# EAGLE board omcPendelautomatik_tapein (EAGLE 7.7.0)
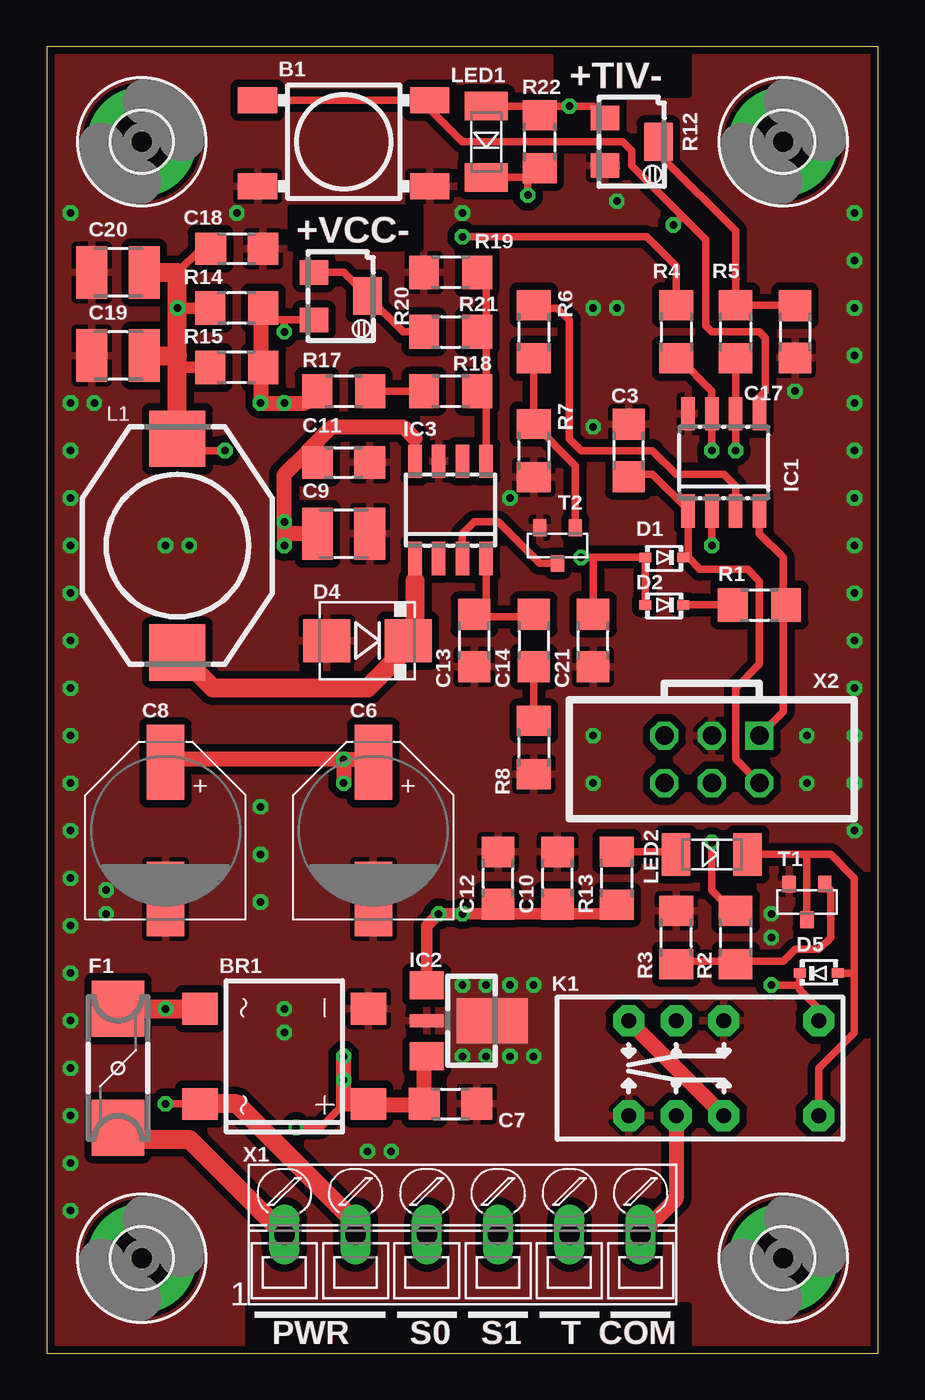
[diagram p0: board, top side]
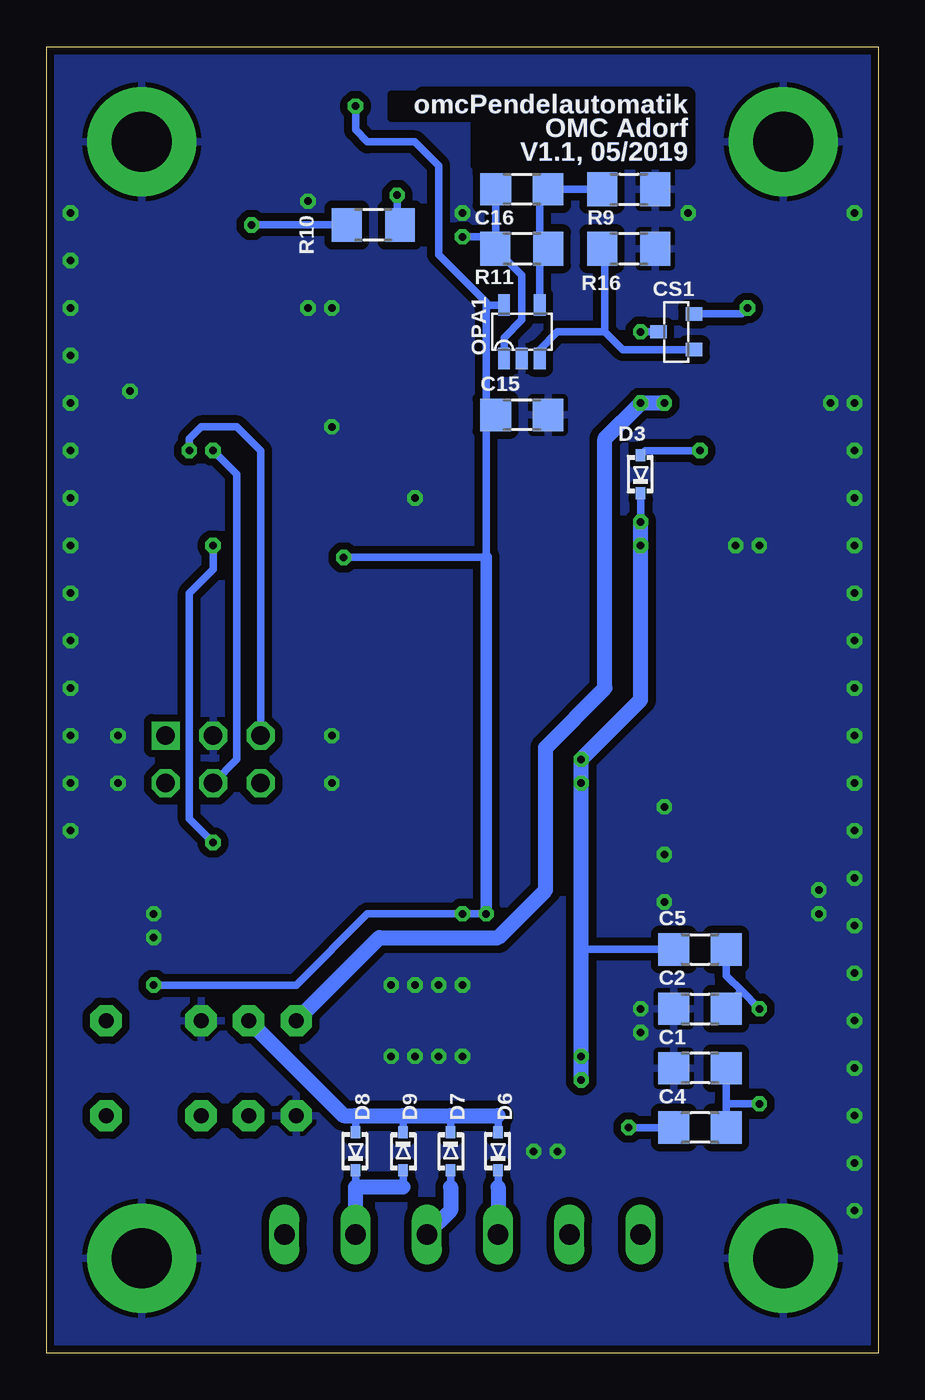
[diagram p1: board, bottom side, seen from below]

Size 44.45 x 69.85 mm. Coordinates in mm from the lower left corner, seen from the top.
Outline: 0,69.84 0,0 44.45,0 44.45,69.85 0,69.85
Copper layers (1*16): Top 0.035mm / dielectric 1.5mm / Bottom 0.035mm
Design rules "aisler_go": minimum track width 0.07mm, minimum drill 0.2mm, track to track 0.07mm, track to pad 0.07mm, pad to pad 0.07mm, via to via 0.07mm, smd to smd 0.07mm, copper to edge 0.2mm, drill to drill 0.21mm, minimum pad ring 0.25mm, minimum via ring 0.05mm, stop-mask expansion 0.05mm, vias tented up to drill 0mil, thermal gap 10mil

## Footprints (pad centres in the part's own frame; a part is rotated, then mirrored left to right if it is on the bottom)
SMD_X4_11X6 = smd 2.1 x 1.4: 1 4.604,-2.381; 2 -4.604,-2.381; 3 4.604,2.223; 4 -4.604,2.223
DBS = smd 1.7 x 1.9: + -2.55,-4.5; - 2.55,-4.5; AC1 -2.55,4.5; AC2 2.55,4.5
1206 = smd 1.651 x 1.727: 1 -1.4,0; 2 1.4,0
PANF = smd 2 x 4: CN 0,-3.651; CP 0,3.651
1210 = smd 1.651 x 2.794: 1 -1.4,0; 2 1.4,0
SOT23 = smd 0.711 x 0.889: 1 -0.953,-0.953; 2 0.953,-0.953; 3 0,0.953
SOD323 = smd 0.635 x 0.508: A 1.016,0; C -1.016,0
DO214AA = smd 2.5 x 2.3: A 2.175,0; C -2.175,0
OMT125 = smd 3 x 2.8: 1 -3.175,0; 2 3.175,0
3,2-PAD = drill 3.2 pad 5.842: B3,2 0,0
SOIC08 = smd 0.72 x 1.78: 1 -1.905,-2.6; 2 -0.635,-2.6; 3 0.635,-2.6; 4 1.905,-2.6; 5 1.905,2.6; 6 0.635,2.6; 7 -0.635,2.6; 8 -1.905,2.6
SOT89W = smd 1.5 x 1.8: 1 -1.905,-1.905; 3 1.905,-1.905 | smd 0.7 x 1.8: 2 0,-1.905 | smd 2.4 x 3.8: 4 0,1.587
SOIC08' = smd 1.78 x 0.72: 1 -2.6,1.905; 2 -2.6,0.635; 3 -2.6,-0.635; 4 -2.6,-1.905; 5 2.6,-1.905; 6 2.6,-0.635; 7 2.6,0.635; 8 2.6,1.905
THT_5M08M_5M08M_2M54M = drill 0.8 pad 1.676 octagon: 1 0,0; 3 5.08,0; 4 7.62,0; 5 10.16,0; 8 10.16,5.08; 9 7.62,5.08; 10 5.08,5.08; 12 0,5.08
PISM = smd 3 x 3: 1 -5.715,0; 2 5.715,0
LED3216 = smd 1.524 x 2.286: 1 -1.905,0; 2 1.905,0
SOT23-5 = smd 0.635 x 1.143: 1 0.953,1.111; 2 1.905,1.111; 3 2.857,1.111; 4 2.857,3.969; 5 0.953,3.969
1206' = smd 1.6 x 1.803: 1 -1.422,0; 2 1.422,0
TTM44W = smd 1.52 x 1.3: 1 4.445,1.905; 3 4.445,4.445 | smd 1.52 x 2.01: 2 1.587,3.175
RT03406T086 = drill 1.1 long: 1 0,0; 2 3.81,0; 3 7.62,0; 4 11.43,0; 5 15.24,0; 6 19.05,0
BOXHD-06-2.54-S = drill 1 square: 1 -1.27,2.54 | drill 1 octagon: 2 1.27,2.54; 3 -1.27,0; 4 1.27,0; 5 -1.27,-2.54; 6 1.27,-2.54

## Placement (x,y rotation side)
B1  JTP1138/4.3  [SMD_X4_11X6]  15.88,64.77 0 top
BR1  DB102S  [DBS]  12.7,15.88 90 top
C1  10n/50V  [1206]  9.53,15.24 180 bottom
C2  10n/50V  [1206]  9.53,18.41 0 bottom
C3  100n/50V  [1206]  31.11,48.26 90 top
C4  10n/50V  [1206]  9.53,12.06 180 bottom
C5  10n/50V  [1206]  9.53,21.59 0 bottom
C6  150µ/35V  [PANF]  17.46,27.94 0 top
C7  2µ2/50V  [1206]  21.59,13.34 0 top
C8  150µ/35V  [PANF]  6.35,27.94 0 top
C9  10µ/35V  [1210]  15.88,43.81 0 top
C10  100n/50V  [1206]  27.3,25.4 90 top
C11  100n/50V  [1206]  15.88,47.62 0 top
C12  2µ2/50V  [1206]  24.13,25.4 90 top
C13  220p/50V  [1206]  22.86,38.1 90 top
C14  22n/50V  [1206]  26.04,38.1 270 top
C15  100n  [1206]  19.05,50.16 180 bottom
C16  2n2  [1206]  19.05,62.23 180 bottom
C17  100n/50V  [1206]  40.01,54.61 270 top
C18  100n/50V  [1206]  10.16,59.05 0 top
C19  47µ/16V  [1210]  3.81,53.34 180 top
C20  47µ/16V  [1210]  3.81,57.78 180 top
C21  100n  [1206]  29.21,38.1 90 top
CS1  ZXCT1009  [SOT23]  10.79,54.61 90 bottom
D1  PMEG4010  [SOD323]  33.02,42.55 180 top
D2  PMEG4010  [SOD323]  33.02,40.01 180 top
D3  PMEG4010  [SOD323]  12.7,46.99 90 bottom
D4  MBRS240  [DO214AA]  17.14,38.1 180 top
D5  PMEG4010  [SOD323]  41.27,20.32 0 top
D6  PMEG4010  [SOD323]  20.32,10.79 90 bottom
D7  PMEG4010  [SOD323]  22.86,10.79 270 bottom
D8  PMEG4010  [SOD323]  27.94,10.79 90 bottom
D9  PMEG4010  [SOD323]  25.4,10.79 270 bottom
F1  T 0A5  [OMT125]  3.81,15.24 90 top
H1  MOUNT-PAD-ROUND3.2  [3,2-PAD]  39.37,5.08 0 top
H2  MOUNT-PAD-ROUND3.2  [3,2-PAD]  39.37,64.77 0 top
H3  MOUNT-PAD-ROUND3.2  [3,2-PAD]  5.08,64.77 0 top
H4  MOUNT-PAD-ROUND3.2  [3,2-PAD]  5.08,5.08 0 top
IC1  PIC12F675  [SOIC08]  36.2,47.62 0 top
IC2  7805  [SOT89W]  22.23,17.78 270 top
IC3  L5970D  [SOIC08']  21.59,45.09 90 top
K1  NA-5V  [THT_5M08M_5M08M_2M54M]  41.27,17.78 180 top
L1  33µ  [PISM]  6.99,43.18 90 top
LED1  Red  [LED3216]  23.5,64.77 270 top
LED2  Yellow  [LED3216]  35.56,26.67 0 top
OPA1  MCP6401  [SOT23-5]  20.95,52.07 0 bottom
R1  22K  [1206']  38.1,40.01 180 top
R2  10K  [1206']  36.83,22.23 90 top
R3  56K  [1206']  33.66,22.23 270 top
R4  1K  [1206']  33.66,54.61 90 top
R5  1K  [1206']  36.83,54.61 90 top
R6  10K  [1206']  26.04,54.61 90 top
R7  56K  [1206']  26.04,48.26 90 top
R8  4K7  [1206']  26.04,32.38 90 top
R9  10K  [1206']  13.34,62.23 180 bottom
R10  1K  [1206']  26.99,60.33 0 bottom
R11  39K  [1206']  19.05,59.05 180 bottom
R12  10K  [TTM44W]  34.29,67.94 180 top
R13  1K  [1206']  30.48,25.4 270 top
R14  1R  [1206']  10.16,55.88 0 top
R15  1R  [1206']  10.16,52.7 0 top
R16  200R  [1206']  13.34,59.05 180 bottom
R17  0R  [1206']  15.88,51.44 180 top
R18  47K  [1206']  21.59,51.44 180 top
R19  3K3  [1206']  21.59,57.78 0 top
R20  50K  [TTM44W]  18.73,59.69 180 top
R21  4K7  [1206']  21.59,54.61 180 top
R22  56K  [1206']  26.35,64.77 90 top
T1  BSS138  [SOT23]  40.64,24.13 180 top
T2  BSS138  [SOT23]  27.3,43.18 180 top
X1  RT034 Typ 086  [RT03406T086]  12.7,6.35 0 top
X2  2X3  [BOXHD-06-2.54-S]  35.56,31.75 270 top

## Library data of the parts
B1 = omcSwitch; DIST#REICHELT#: TASTER 9314
BR1 = omcDiode; DIST#REICHELT#: SMD DB1A70; VENDOR#: SEP ELECTRONIC CORP.,DB102S
C1 C2 C4 C5 = omcCapacitor; DIST#REICHELT#: X7R-G1206 10N; VENDOR#: YAGEO,12062R103K9BP0D
C3 C10 C11 C15 C17 C18 C21 = omcCapacitor; DIST#REICHELT#: X7R-G1206 100N; VENDOR#: YAGEO,12062R104K9BP0D
C6 C8 = omcCapacitor; DIST#REICHELT#: VF 150/35 P-F; ESR: 0R08; I_RIPPLE: 850m; VENDOR#: PANASONIC#EEEFP1V151AP
C7 C12 = omcCapacitor; DIST#REICHELT#: X7R-G1206 2,2/50; VENDOR#: MURATA,GCM31CR71H225KA55
C9 = omcCapacitor; DIST#REICHELT#: X7R-G1210 10; VENDOR#: MURATA,GCM32EC7YA106KA03
C13 = omcCapacitor; DIST#REICHELT#: NPO-G1206 220P; VENDOR#: YAGEO#1206CG221J9BP
C14 = omcCapacitor; DIST#REICHELT#: X7R-G1206 22N; VENDOR#: YAGEO,12062R223K9BP0D
C16 = omcCapacitor; DIST#REICHELT#: NPO-G1206 2,2N; VENDOR#: YAGEO#1206CG222J9BP
C19 C20 = omcCapacitor; DIST#REICHELT#: X5R-G1210 47; VENDOR#: MURATA,GRM32ER61C476ME15#
CS1 = omcPwrSupply; DIST#REICHELT#: ZXCT 1009FTA; VENDOR#: Diodes Incorporated, ZXCT1009
D1-D3 D5-D9 = omcDiode; DIST#REICHELT#: PMEG 4010BEA NXP; VENDOR#: NXP,PMEG3010BEA
D4 = omcDiode; DIST#REICHELT#: MBRS 240 SMD; VENDOR#: On Semiconductor,MBRS240LT3G
F1 = omcFuse; DIST#REICHELT#: OMT 125 0,5A; VENDOR#: Schurter,3404.0112.11
H1-H4 = holes
IC1 = omcPIC; DIST#REICHELT#: PIC 12F675-I/SN; VENDOR#: Microchip#PIC12F675-I/SN
IC2 = omcPwrSupply; DIST#REICHELT#: TS 78L05 ACY; VENDOR#: STM,L78L05ABUTR
IC3 = omcPwrSupply; DIST#CONRAD#: 1185187 - 62; DIST#REICHELT#: L 5970 D; VENDOR#: STM,L5970D013TR
K1 = omcRelay; DIST#REICHELT#: NA 05W K; VENDOR#: Fujitsu,NAA-05W-K
L1 = omcInductor; DIST#REICHELT#: L-PISM 33µ; VENDOR#: Fastron,PISM-330X-04
LED1 = omcOpto; DIST#REICHELT#: SMD-LED 1206 RT; VENDOR#: Kingbright,KP-3216HD
LED2 = omcOpto; DIST#REICHELT#: SMD-LED 1206 GE; VENDOR#: Kingbright,KP-3216SYD
OPA1 = omcOpAmp; DIST#REICHELT#: MCP 6401T-E/OT; VENDOR#: Microchip, MCP6401T-E/OT
R1 = omcResistor; DIST#REICHELT#: SMD 1/4W 22K; VENDOR#: YAGEO#RC1206FR-0722KL
R2 R6 R9 = omcResistor; DIST#REICHELT#: SMD 1/4W 10K; VENDOR#: YAGEO#RC1206FR-0710KL
R3 R7 R22 = omcResistor; DIST#REICHELT#: SMD 1/4W 56K; VENDOR#: YAGEO#RC1206FR-0756KL
R4 R5 R10 R13 = omcResistor; DIST#REICHELT#: SMD 1/4W 1,0K; VENDOR#: YAGEO#RC1206FR-071K0L
R8 R21 = omcResistor; DIST#REICHELT#: SMD 1/4W 4,7K; VENDOR#: YAGEO#RC1206FR-074K7L
R11 = omcResistor; DIST#REICHELT#: SMD 1/4W 39K; VENDOR#: YAGEO#RC1206FR-0739KL
R12 = omcResistor; DIST#REICHELT#: 44W-10K; VENDOR#: TT Electronics, 44 G R 10K LF
R14 R15 = omcResistor; DIST#REICHELT#: SMD 1/4W 1,0; VENDOR#: YAGEO#RC1206FR-071R0L
R16 = omcResistor; DIST#REICHELT#: SMD 1/4W 200; VENDOR#: YAGEO#RC1206FR-07200RL
R17 = omcResistor; DIST#REICHELT#: SMD 1/4W 0,0; VENDOR#: YAGEO#RC1206FR-070R0L
R18 = omcResistor; DIST#REICHELT#: SMD 1/4W 47K; VENDOR#: YAGEO#RC1206FR-0747KL
R19 = omcResistor; DIST#REICHELT#: SMD 1/4W 3,3K; VENDOR#: YAGEO#RC1206FR-073K3L
R20 = omcResistor; DIST#REICHELT#: 44W-50K; VENDOR#: TT Electronics, 44 G R 50K LF
T1 T2 = omcTransistor; #VENDOR: ON_SEMICONDUCTOR,BSS138L; DIST#REICHELT#: BSS 138 SMD
X1 = omcConnector; DIST#REICHELT#: AKL 086-06; VENDOR#: Metz Connect#31086106
X2 = omcConnector; DIST#REICHELT#: WSL 6G

## Nets
+5V: C10.1 C12.1 C15.2 C21.2 D1.A D2.A D5.C IC2.1 K1.1 LED1.1 OPA1.5 R12.1 R13.2 R22.2
GND: B1.1 B1.2 BR1.- C1.2 C2.1 C3.2 C6.CN C7.2 C8.CN C9.2 C10.2 C11.2 C12.2 C13.1 C15.1 C17.2 C18.2 C19.2 C20.2 C21.1 D4.A H1.B3,2 H2.B3,2 H3.B3,2 H4.B3,2 IC1.8 IC2.2 IC2.4 IC3.7 K1.3 K1.8 OPA1.2 R3.1 R7.1 R8.1 R9.1 R12.3 R16.1 R19.1 T1.2 T2.2 X2.3
I_VCC: C16.2 OPA1.1 R4.2 R11.2
ICSPCLK: IC1.6 R5.1 X2.5
ICSPDAT: IC1.7 R4.1 X2.4
N$1: D4.C IC3.1 L1.1
N$2: R20.1 R20.2 R21.2
N$3: C13.2 C14.1 IC3.4
N$4: C14.2 R8.2
N$5: R2.1 R3.2 T1.1
N$6: BR1.+ C4.2 C5.1 C6.CP C7.1 C8.CP C9.1 C11.1 D3.C IC2.3 IC3.8
N$7: C3.1 D1.C IC1.1 X2.2
N$8: F1.1 X1.1
N$9: IC3.5 R18.1 R19.2 R21.1
N$10: IC1.4 R1.1 X2.1
N$11: D2.C R1.2
N$12: IC1.2 R2.2
N$13: R6.1 R7.2 T2.1
N$14: IC1.3 R6.2
N$15: LED2.1 R13.1
N$16: R17.1 R18.2
N$17: BR1.AC1 C1.1 C4.1 X1.2
N$18: D6.C X1.3
N$19: C17.1 R5.2 R12.2
N$20: C16.1 OPA1.4 R9.2 R11.1
N$21: D7.A X1.4
N$22: D6.A D7.C D8.A D9.C K1.4
N$23: BR1.AC2 C2.2 C5.2 F1.2
N$24: K1.9 X1.6
N$27: B1.3 B1.4 IC1.5 R10.1
N$29: D8.C D9.A X1.5
N$32: LED1.2 R10.2 R22.1
REGON: IC3.3 T2.3
RLON: D5.A K1.12 LED2.2 T1.3
V_ISNS: CS1.1 OPA1.3 R16.2
VCC: CS1.3 K1.5 K1.10 R14.2 R15.2 R17.2 R20.3
VOUT: C18.1 C19.1 C20.1 CS1.2 D3.A L1.2 R14.1 R15.1

## Tracks (layer width: path | path; a pad name or v marks a point on that pad's centre or on a via)
+5V  (via drill 0.4 pad 0.81)
  Top 0.406: 29.84,23.5 30,23.5 R13.2 30.48,23.5 | K1.1 41.27,18.41 40.26,19.43 40.26,19.68 | v38.73,19.68 40.26,19.68 | D5.C 40.26,19.68 | C12.1 24.13,23.5 | C10.1 27.3,23.5 | v28.57,42.55 29.21,42.55 | C21.2 29.21,42.55 | D2.A D1.A 29.21,42.55 | LED1.1 26.35,66.67 | R22.2 26.35,66.67 | 26.35,66.67 v27.94,66.67 29.21,66.67 R12.1
  Top 0.61: IC2.1 20.32,22.86 v20.95,23.5 v22.23,23.5 24.13,23.5 27.3,23.5 30.48,23.5
  Bottom 0.406: v38.73,19.68 31.11,19.68 27.3,23.5 v22.23,23.5 v20.95,23.5 | 20.95,55.88 20.95,56.2 23.5,58.74 23.5,63.5 24.77,64.77 27.3,64.77 27.94,65.41 v27.94,66.67 | 20.95,55.88 20.95,50.67 C15.2 20.95,49.66 20.95,42.55 v28.57,42.55 | OPA1.5 20.8,56.04 20.95,55.88
  Bottom 0.61: v20.95,23.5 20.95,42.55
GND  (via drill 0.4 pad 0.81)
  other vias: 12.7,18.41 12.7,17.14 17.14,10.79 18.41,10.79 23.5,15.88 24.77,15.88 26.04,15.88 23.5,19.68 24.77,19.68 26.04,19.68 10.16,60.96 2.54,50.8 24.77,45.72 29.21,49.53 40.01,51.44 30.48,61.59 3.17,24.77 3.17,23.5 22.23,19.68 22.23,15.88 38.73,22.23 43.18,58.42 43.18,55.88 43.18,53.34 43.18,50.8 43.18,48.26 43.18,45.72 43.18,43.18 43.18,40.64 43.18,38.1 43.18,35.56 43.18,33.02 43.18,30.48 43.18,27.94 43.18,60.96 29.21,33.02 1.27,60.96 1.27,50.8 1.27,48.26 1.27,45.72 1.27,43.18 1.27,40.64 1.27,38.1 1.27,35.56 1.27,33.02 1.27,30.48 1.27,27.94 1.27,25.4 1.27,22.86 1.27,20.32 1.27,17.78 1.27,15.24 1.27,12.7 1.27,10.16 1.27,7.62 29.21,30.48 6.35,43.18 7.62,43.18 29.21,55.88 30.48,55.88 11.43,29.21 11.43,26.67 11.43,24.13 38.73,23.5 40.64,33.02 40.64,30.48 22.23,60.96
  pour Top (isolate 0.406, no thermals): 20.95,20.95 20.95,14.61 27.3,14.61 27.3,20.95
  pour Top (isolate 0.406): 0,69.85 0,0 44.45,0 44.45,69.85
  pour Bottom (isolate 0.406): 0,69.85 0,0 44.45,0 44.45,69.85
I_VCC  (via drill 0.4 pad 0.81)
  Top 0.406: 33.66,56.52 R4.2 33.66,58.1 32.07,59.69 v22.23,59.69
  Bottom 0.406: OPA1.1 20,54.29 19.05,55.24 19.05,57.63 R11.2 20.45,59.08 20.45,59.69 | C16.2 20.45,59.69 | v22.23,59.69 20.45,59.69
ICSPCLK  (via drill 0.4 pad 0.81)
  Top 0.406: R5.1 IC1.6 v36.83,48.26
  Bottom 0.406: X2.5 33.02,48.26 34.29,49.53 36.2,49.53 36.83,48.9 v36.83,48.26
ICSPDAT  (via drill 0.4 pad 0.81)
  Top 0.406: v35.56,48.26 IC1.7 35.56,51.44 33.81,53.19 R4.1
  Bottom 0.406: X2.4 34.29,31.75 34.29,46.99 v35.56,48.26
N$1
  Top 0.61: IC3.1 19.68,41.27 | 19.68,38.1 D4.C
  Top 1.016: 6.99,38.1 L1.1 8.89,35.56 17.14,35.56 19.68,38.1 19.68,41.27
N$2
  Top 0.406: R20.1 15.88,57.78 R20.2 19.05,54.61 R21.2
N$3
  Top 0.406: IC3.4 23.5,39.37 | 23.5,39.37 25.91,39.37 C14.1 | 23.5,39.37 22.99,39.37 C13.2
N$4
  Top 0.406: C14.2 R8.2
N$5
  Top 0.406: R2.1 36.5,20.8 | T1.1 41.91,24.77 41.91,22.23 41.27,21.59 40.01,21.59 39.37,20.95 36.98,20.95 R2.1 | R3.2 33.81,20.95 36.83,20.95 R2.1
N$6  (via drill 0.4 pad 0.81)
  Top 0.406: v13.34,12.06 14.62,12.06 15.88,13.32 | 19.68,48.9 IC3.8 | C11.1 14.47,47.76 13.97,48.26
  Top 0.813: v15.88,31.75 17.62,31.75 C6.CP | v15.88,31.75 6.51,31.75 C8.CP | v15.88,31.75 v15.88,30.48 | v15.88,15.88 v15.88,14.61 15.88,13.34 15.88,13.32 BR1.+ 17.2,13.28 20.14,13.28 C7.1 20.19,15.74 | 12.7,43.81 v12.7,44.45 12.7,46.99 13.97,48.26 15.24,49.53 19.05,49.53 19.68,48.9 | 12.7,43.81 v12.7,43.18 | C9.1 12.7,43.81
  Top 1.016: C8.CP 5.87,31.59 | 20.19,15.74 IC2.3
  Bottom 0.406: C4.2 v13.34,12.06 | C5.1 15.88,21.59 | D3.C v12.7,44.45
  Bottom 0.813: v15.88,15.88 v15.88,14.61 15.88,21.59 v15.88,30.48 v15.88,31.75 12.7,34.92 v12.7,43.18 v12.7,44.45
N$7
  Top 0.406: C3.1 31.25,46.99 32.38,46.99 34.23,45.15 34.23,45.09 IC1.1 34.29,42.55 | X2.2 36.83,31.75 36.83,35.56 38.1,36.83 38.1,41.27 37.47,41.91 34.92,41.91 34.29,42.55 | D1.C 34.29,42.55
N$8
  Top 1.016: X1.1 7.62,11.43 4.45,11.43 F1.1
N$9
  Top 0.406: IC3.5 23.5,51.44 | 23.5,51.44 23.5,54.61 | 23.5,54.61 23.5,57.3 R19.2 | R21.1 23.5,54.61 | R18.1 23.5,51.44
N$10
  Top 0.406: IC1.4 38.1,43.81 39.37,42.55 39.37,40.01 | 39.37,40.01 39.37,34.29 X2.1 | R1.1 39.37,40.01
N$11
  Top 0.406: D2.C R1.2
N$12  (via drill 0.4 pad 0.81)
  Top 0.406: R2.2 36.68,23.65 35.56,24.77 v35.56,27.3 | v35.56,43.18 IC1.2
  Bottom 0.406: v35.56,27.3 36.83,28.57 36.83,40.64 35.56,41.91 v35.56,43.18
N$13
  Top 0.406: 26.19,50.16 R7.2 | R6.1 R7.2 | T2.1 28.26,47.46 R7.2
N$14
  Top 0.406: IC1.3 36.83,46.35 36.2,46.99 33.66,46.99 32.38,48.26 28.57,48.26 27.94,48.9 27.94,55.24 27.3,55.88 26.19,55.88 R6.2
N$15
  Top 0.406: R13.1 33.5,26.82 LED2.1
N$16
  Top 0.406: R17.1 R18.2
N$17  (via drill 0.4 pad 0.81)
  Top 0.406: 8.21,13.34 v6.35,13.34
  Top 1.016: X1.2 16.51,6.99 10.16,13.34 8.21,13.34 BR1.AC1
  Bottom 0.406: C1.1 8.12,13.34 | 8.12,13.34 C4.1 8.12,12.2 | v6.35,13.34 8.12,13.34
N$18
  Bottom 0.406: D6.C 20.32,8.89
  Bottom 0.813: 20.32,8.89 X1.3
N$19
  Top 0.406: 32.38,64.45 R12.2 33.02,64.45 33.02,63.82 36.83,60.01 R5.2 39.98,56.03 C17.1
N$20
  Bottom 0.406: OPA1.4 18.1,59.05 | 18.1,59.05 18.1,61.78 C16.1 R9.2 | R11.1 18.1,59.05
N$21
  Bottom 0.406: D7.A 22.86,8.89
  Bottom 0.813: 22.86,8.89 22.86,7.62 X1.4
N$22
  Bottom 0.406: D8.A 27.94,12.7 | D9.C 25.4,12.7 | D7.C 22.86,12.7 | D6.A 20.32,12.7
  Bottom 0.813: K1.4 28.57,12.7 27.94,12.7 25.4,12.7 22.86,12.7 20.32,12.7
N$23  (via drill 0.4 pad 0.81)
  Top 1.016: F1.2 v6.35,18.41 8.19,18.41 BR1.AC2
  Bottom 0.406: C5.2 8.12,20.19 7.3,19.37 | 7.3,19.37 v6.35,18.41 | C2.2 8.12,18.55 7.3,19.37
N$24
  Top 0.813: K1.9 33.66,8.26 X1.6
N$25
  cutout Top (isolate 0.254): 13.02,61.28 13.02,59.05 20,59.05 20,61.28
N$26
  cutout Top (isolate 0.406): 10.79,2.54 10.79,0 34.29,0 34.29,2.54
N$27  (via drill 0.4 pad 0.81)
  Top 0.406: B1.4 20,66.99 | 20,66.99 22.23,64.77 30.8,64.77 31.27,64.29 31.27,63.5 33.97,60.8 | IC1.5 38.1,51.12 38.42,51.44 38.42,54.29 38.1,54.61 35.56,54.61 35.24,54.93 35.24,59.53 33.97,60.8 | v33.5,60.33 33.97,60.8 | B1.3 20,66.99
  Bottom 0.406: R10.1 v33.5,60.33
N$29
  Bottom 0.406: D9.A 25.4,8.89 | D8.C 27.94,8.89
  Bottom 0.813: X1.5 27.94,8.89 25.4,8.89
N$30
  cutout Top (isolate 0.406): 27.3,69.53 27.3,67.31 34.29,67.31 34.29,69.53
N$31
  cutout Bottom: 10.16,67.31 10.16,63.5 21.59,63.5 21.59,66.04 26.04,66.04 26.04,67.31
N$32  (via drill 0.4 pad 0.81)
  Top 0.406: LED1.2 25.72,62.87 | 25.72,62.87 25.87,62.87 R22.1 | v25.72,61.91 25.72,62.87
  Bottom 0.406: v25.72,61.91 25.72,60.48 R10.2
REGON
  Top 0.406: IC3.3 22.23,43.81 22.86,44.45 24.13,44.45 26.35,42.23 T2.3
RLON
  Top 0.406: LED2.2 40.64,26.67 | 40.64,26.67 41.91,26.67 43.18,25.4 43.18,20.32 | 40.64,26.67 T1.3 | K1.12 41.27,15.24 43.18,17.14 43.18,20.32 | D5.A 43.18,20.32
V_ISNS
  Bottom 0.406: OPA1.3 18.1,53.66 17.14,54.61 14.61,54.61 | CS1.1 13.65,53.66 14.61,54.61 | 14.61,54.61 14.61,58.9 R16.2
VCC  (via drill 0.4 pad 0.81)
  Top 0.406: R20.3 12.7,55.24 | 11.43,55.24 12.7,55.24 | 12.7,55.24 v12.7,54.61
  Top 0.813: K1.10 K1.5 | R14.2 11.43,55.73 11.43,55.24 11.43,52.7 | 11.43,52.7 v11.43,50.8 v12.7,50.8 13.82,50.8 R17.2 | R15.2 11.43,52.7
  Bottom 0.406: CS1.3 v12.7,54.61
  Bottom 0.813: K1.5 26.67,22.23 20.32,22.23 17.78,24.77 17.78,32.38 14.61,35.56 14.61,48.9 v12.7,50.8 v11.43,50.8
VOUT  (via drill 0.4 pad 0.81)
  Top 0.406: C18.1 8.26,59.05 6.99,57.78 | v9.53,48.26 7.62,48.26
  Top 0.61: R14.1 v6.99,55.88 | R15.1 6.99,52.7 | 7.62,48.26 L1.2
  Top 1.016: L1.2 6.99,52.7 6.99,53.34 | 6.99,53.34 v6.99,55.88 6.99,57.78 C20.1 | C19.1 6.99,53.34
  Bottom 0.406: CS1.2 7.3,55.56 v6.99,55.88 | v9.53,48.26 12.45,48.26 D3.A
(copper drawn outside any net)
  shapes: Top area x5

## Text on the board
Top: +TIV- | +VCC- | PWR | S0 | S1 | T | COM
Bottom: omcPendelautomatik | OMC Adorf | V1.1, 05/2019
tNames: +TIV- | +VCC- | PWR | S0 | S1 | T | COM
bNames: omcPendelautomatik | OMC Adorf | V1.1, 05/2019